# EAGLE board kicker3.0 (EAGLE 4.16)
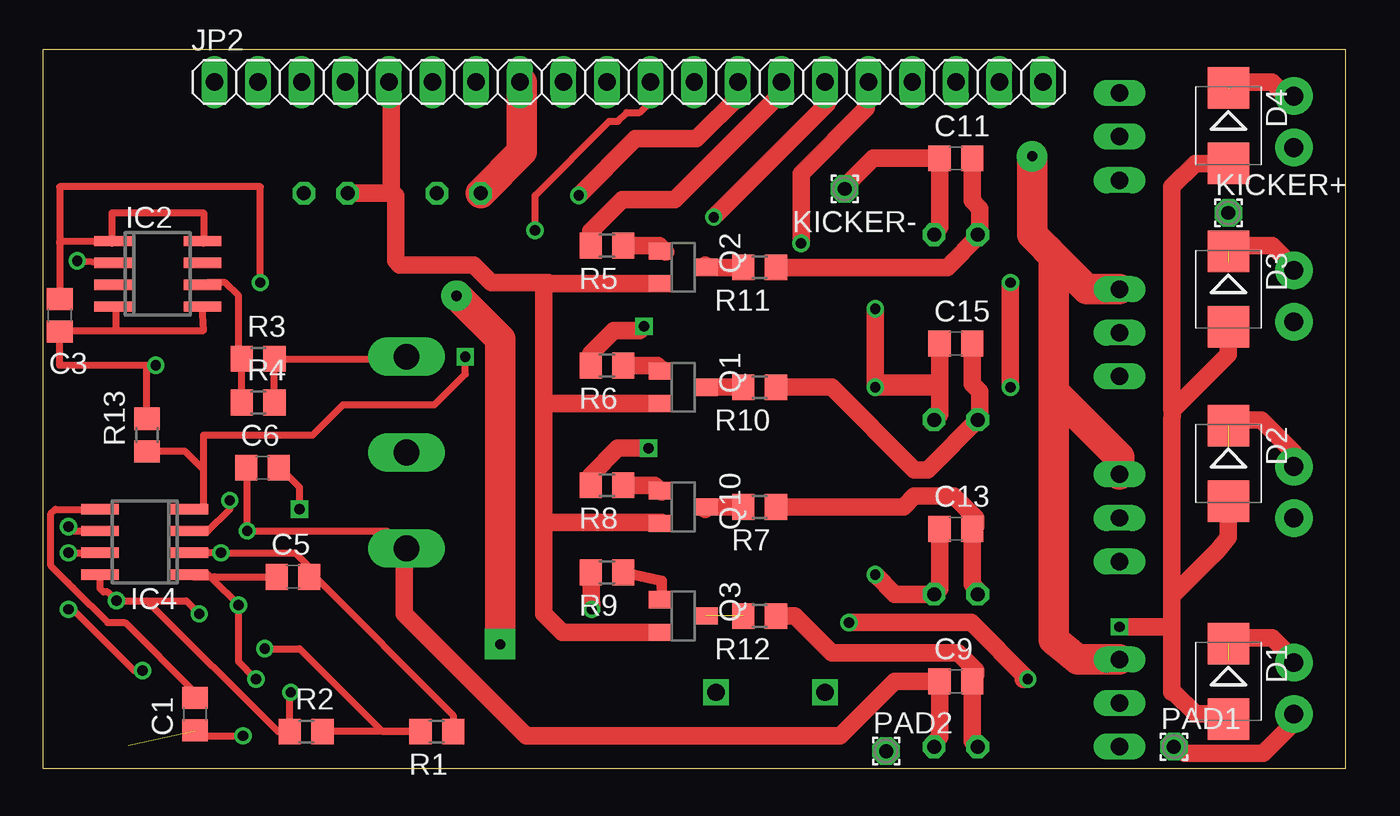
[diagram p0: board, top side]
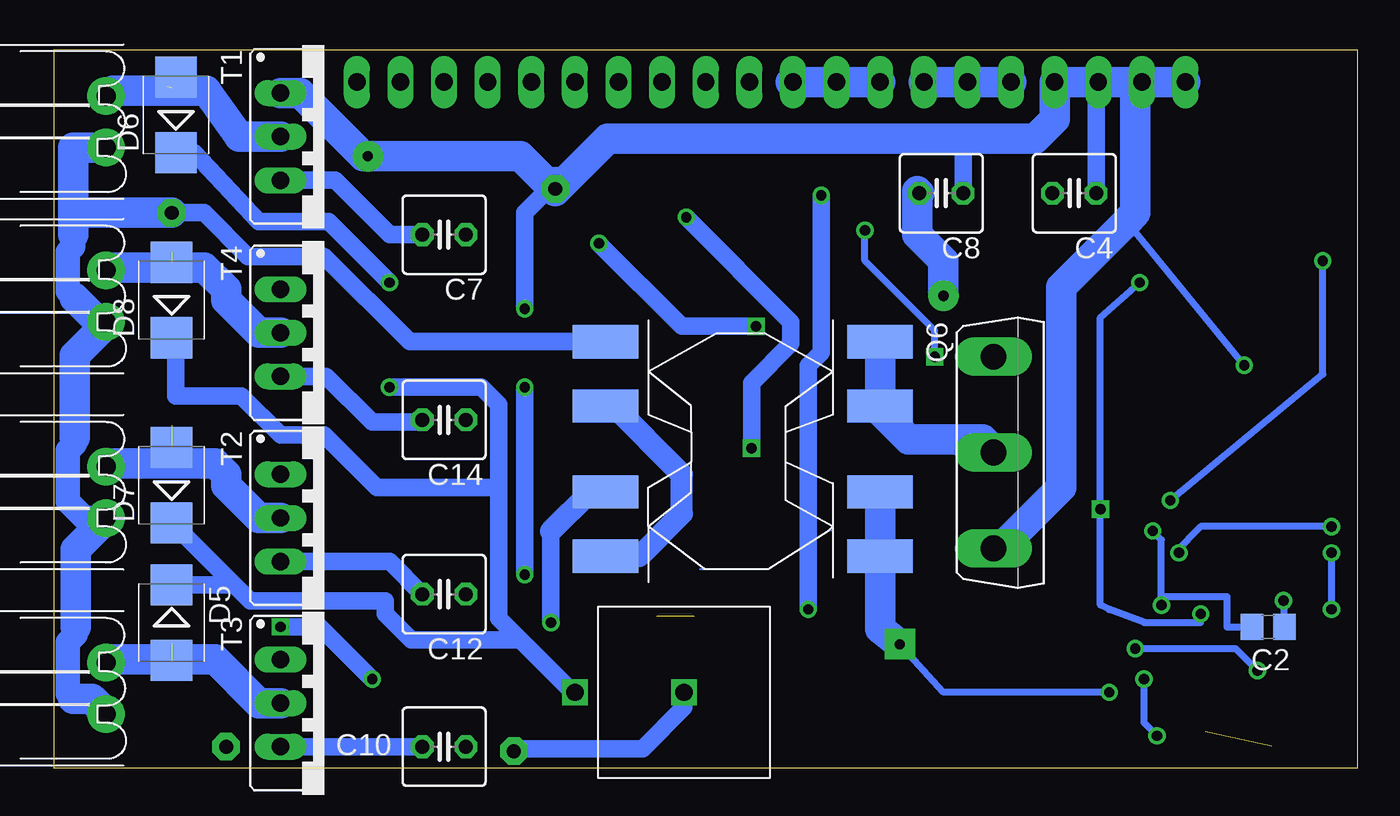
[diagram p1: board, bottom side, seen from below]

Size 75.87 x 41.9 mm. Coordinates in mm from the lower left corner, seen from the top.
Outline: 0,0 75.87,0 75.87,41.9 0,41.9 0,0
Copper layers (1*16): Top 0.035mm / dielectric 1.5mm / Bottom 0.035mm
Design rules "default": minimum track width 10mil, minimum drill 24mil, track to track 8mil, track to pad 8mil, pad to pad 8mil, via to via 8mil, smd to smd 8mil, copper to edge 40mil, drill to drill 8mil, minimum pad ring 10mil, minimum via ring 8mil, stop-mask expansion 4mil, vias tented up to drill 0mil, thermal gap 10mil

## Footprints (pad centres in the part's own frame; a part is rotated, then mirrored left to right if it is on the bottom)
C0805 = smd 1.3 x 1.5: 1 -0.95,0; 2 0.95,0
C025-050X050 = drill 0.813 octagon: 1 -1.27,0; 2 1.27,0
2007 = drill 1.1 pad 2.184 round: P$1 0,0; P$2 3,0
SMB = smd 2.4 x 2.4: A 2.2,0; C -2.2,0
SO-08 = smd 0.6 x 2.2: 1 -1.905,-2.6; 2 -0.635,-2.6; 3 0.635,-2.6; 4 1.905,-2.6; 5 1.905,2.6; 6 0.635,2.6; 7 -0.635,2.6; 8 -1.905,2.6
SO08 = smd 0.6 x 2.2: 1 -1.905,-2.6; 2 -0.635,-2.6; 3 0.635,-2.6; 4 1.905,-2.6; 5 1.905,2.6; 6 0.635,2.6; 7 -0.635,2.6; 8 -1.905,2.6
1X20 = drill 1.016 long: 1 -24.13,0; 2 -21.59,0; 3 -19.05,0; 4 -16.51,0; 5 -13.97,0; 6 -11.43,0; 7 -8.89,0; 8 -6.35,0; 9 -3.81,0; 10 -1.27,0; 11 1.27,0; 12 3.81,0; 13 6.35,0; 14 8.89,0; 15 11.43,0; 16 13.97,0; 17 16.51,0; 18 19.05,0; 19 21.59,0; 20 24.13,0
1,6/0,8 = drill 0.813 pad 1.6 octagon: 1 0,0
SOT23W = smd 1 x 1.4: 1 -0.95,-1.303; 2 0.95,-1.303; 3 0,1.303
TO247BV = drill 1.499 long: D 0,-2.921; G -5.588,-2.921; S 5.588,-2.921
R0805 = smd 1.3 x 1.5: 1 -0.95,0; 2 0.95,0
TO220CS = drill 1.016 long: A 0,-2.54; C -2.54,-2.54; G 2.54,-2.54
SM = smd 3.81 x 1.93: 1 0.5,-3.5; 2 0.5,0.25; 3 0.5,5.25; 4 0.5,9; 5 16.5,9; 6 16.5,5.25; 7 16.5,0.25; 8 16.5,-3.5
XICON = drill 1 square: P$1 0,0; P$2 6.35,0

## Placement (x,y rotation side)
C1  0.1 uF  [C0805]  8.85,3.17 90 top
C2  0.1 uF  [C0805]  5.17,8.25 180 bottom
C3  0.1 uF  [C0805]  0.98,26.41 90 top
C4  100uF  [C025-050X050]  16.47,33.52 180 bottom
C5  1000 pF  [C0805]  14.57,11.17 0 top
C6  0.1 uF  [C0805]  12.79,17.52 0 top
C7  100uF  [C025-050X050]  53.17,31.11 180 bottom
C8  100uF  [C025-050X050]  24.22,33.52 180 bottom
C9  0.1 uF  [C0805]  53.17,5.08 0 top
C10  100uF  [C025-050X050]  53.17,1.27 180 bottom
C11  0.1 uF  [C0805]  53.17,35.55 0 top
C12  100uF  [C025-050X050]  53.17,10.16 180 bottom
C13  0.1 uF  [C0805]  53.17,13.97 0 top
C14  100uF  [C025-050X050]  53.17,20.31 180 bottom
C15  0.1 uF  [C0805]  53.17,24.76 0 top
CAP1  2PINHEADER  [2007]  72.86,3.17 90 bottom
CAP2  2PINHEADER  [2007]  72.86,14.6 90 bottom
CAP3  2PINHEADER  [2007]  72.86,26.03 90 bottom
CAP4  2PINHEADER  [2007]  72.86,36.19 90 bottom
D1  ES2D  [SMB]  69.05,5.08 270 top
D2  ES2D  [SMB]  69.05,17.77 270 top
D3  ES2D  [SMB]  69.05,27.93 270 top
D4  ES2D  [SMB]  69.05,37.46 270 top
D5  ES2D  [SMB]  69.05,8.5 270 bottom
D6  ES2D  [SMB]  68.8,38.1 90 bottom
D7  ES2D  [SMB]  69.05,16.5 90 bottom
D8  ES2D  [SMB]  69.05,27.3 90 bottom
IC2  MIC4420M  [SO-08]  6.69,28.82 270 top
IC4  TLC555CP  [SO08]  5.93,13.2 90 top
JP2  [1X20]  34.12,40 0 top
KICKER+  [1,6/0,8]  69.05,32.38 0 top
KICKER-  [1,6/0,8]  46.7,33.78 0 top
PAD1  [1,6/0,8]  65.88,1.27 0 top
PAD2  [1,6/0,8]  49.11,1.01 0 top
Q1  [SOT23W]  37.3,22.22 270 top
Q2  [SOT23W]  37.3,29.2 270 top
Q3  [SOT23W]  37.3,8.89 270 top
Q6  RFP250  [TO247BV]  18.25,18.41 270 bottom
Q10  [SOT23W]  37.3,15.24 270 top
R1  2.2K  [R0805]  22.95,2.15 180 top
R2  390  [R0805]  15.33,2.15 0 top
R3  10  [R0805]  12.54,23.87 0 top
R4  10  [R0805]  12.54,21.33 0 top
R5  1K  [R0805]  32.85,30.47 180 top
R6  1K  [R0805]  32.85,23.49 180 top
R7  50  [R0805]  41.74,15.24 180 top
R8  1K  [R0805]  32.85,16.5 180 top
R9  1K  [R0805]  32.85,11.43 180 top
R10  50  [R0805]  41.74,22.22 180 top
R11  50  [R0805]  41.74,29.2 180 top
R12  50  [R0805]  41.74,8.89 180 top
R13  1K  [R0805]  6.06,19.43 90 top
T1  S6025L  [TO220CS]  60.16,36.83 270 bottom
T2  S6025L  [TO220CS]  60.16,14.6 270 bottom
T3  S6025L  [TO220CS]  60.16,3.8 270 bottom
T4  S6025L  [TO220CS]  60.16,25.39 270 bottom
U$1  A0009-AL  [SM]  44.28,15.87 0 bottom
U$2  XICON  [XICON]  39.2,4.44 180 bottom

## Library data of the parts
C1-C15 R1-R13 = rcl
CAP1-CAP4 = kickerHeader
D1-D8 = diode
IC2 Q6 = transistor-power
IC4 = linear
JP2 = pinhead
KICKER+ KICKER- PAD1 PAD2 = wirepad
Q1-Q3 Q10 = semicon-smd-ipc
T1-T4 = triac
U$1 = Kicker
U$2 = robocup

## Nets
+5V: C4.2 JP2.5 JP2.6 JP2.7 Q1.2 Q2.2 Q3.2 Q10.2
+12V: C2.1 C3.2 C6.2 C8.2 IC2.1 IC2.8 IC4.8 JP2.8 JP2.9 JP2.10 R2.1 U$1.7 U$1.8
CHARGESHUTOFF: IC4.4 JP2.11 R13.1
N$1: Q6.G R3.2 R4.2
N$2: U$1.1 U$1.3
N$3: Q2.1 R5.1
N$4: IC2.6 R3.1 R4.1
N$5: Q6.D U$1.5 U$1.6
N$6: D1.A D2.A D3.A D4.A U$1.2
N$7: CAP2.P$2 D2.C D7.A T2.A
N$8: C9.2 C10.2 R12.1 T3.G
N$9: Q1.1 R6.1
N$10: CAP3.P$2 D3.C D8.A T4.A
N$12: Q3.1 R9.1
N$13: C12.2 C13.2 R7.1 T2.G
N$14: Q1.3 R10.2
N$15: Q2.3 R11.2
N$16: Q3.3 R12.2
N$17: IC4.7 R1.2 R2.2
N$18: C1.2 IC4.5
N$19: CAP1.P$1 CAP2.P$1 CAP3.P$1 CAP4.P$1 KICKER+.1 PAD1.1 U$1.4
N$20: JP2.15 R8.2
N$21: C5.2 IC4.2 IC4.6 R1.1
N$22: CAP1.P$2 D1.C D5.A T3.A
N$23: C7.2 C11.2 R11.1 T1.G
N$24: IC2.2 IC4.3
N$25: D5.C D6.C D7.C D8.C U$2.P$2
N$26: CAP4.P$2 D4.C D6.A T1.A
N$27: PAD2.1 U$2.P$1
N$28: C14.2 C15.2 R10.1 T4.G
N$30: JP2.13 R9.2
N$31: Q10.3 R7.2
N$32: JP2.14 R5.2
N$33: JP2.16 R6.2
N$34: Q10.1 R8.1
PE: C1.1 C2.2 C3.1 C4.1 C5.1 C6.1 C7.1 C8.1 C9.1 C10.1 C11.1 C12.1 C13.1 C14.1 C15.1 IC2.4 IC2.5 IC4.1 JP2.1 JP2.2 JP2.3 JP2.4 KICKER-.1 Q6.S R13.2 T1.C T2.C T3.C T4.C

## Tracks (layer width: path | path; a pad name or v marks a point on that pad's centre or on a via)
+5V
  Top 1.016: Q3.2 30.25,7.93 29.17,9.01 29.17,14.35 | 29.17,14.35 29.17,21.2 | 29.17,21.2 29.17,28.32 | Q10.2 36,14.31 36.03,14.35 29.17,14.35 | 29.17,21.2 29.43,21.2 29.49,21.27 Q1.2 | 29.17,28.32 29.43,28.32 29.49,28.25 Q2.2 | JP2.7 25.23,39.87 25.11,39.75 25.36,39.49 25.36,39.24 | JP2.5 20.28,40 20.28,33.65 | C4.2 20.15,33.52 20.28,33.65 | 29.17,28.32 26.12,28.32 25.11,29.33 20.79,29.33 20.54,29.59 20.54,33.4 20.28,33.65
  Bottom 1.778: JP2.5 JP2.6 JP2.7
+12V  (via drill 0.6 pad 0.41, 0.6 pad 1.78)
  Top 0.406: IC4.8 3.33,10.47 3.52,10.28 3.77,10.28 v4.28,9.77 6.06,9.77 | 6.06,9.77 13.68,2.15 R2.1 14.38,4.38 v14.44,4.44 | 6.06,9.77 8.34,9.77 v9.11,9.01 | 13.74,17.59 13.68,17.65 | 13.74,17.59 C6.2 13.81,17.52 14.95,16.38 | 14.95,16.38 13.74,17.59 | v14.95,15.11 14.95,16.38 | v12.66,28.32 12.66,33.9 0.98,33.9 0.98,30.6 | 9.36,30.86 9.04,30.79 IC2.8 9.36,30.73 | 4.03,30.73 4.03,30.6 | 4.03,30.73 IC2.1 0.98,30.73 0.98,30.6 | 4.03,30.73 4.03,32.38 9.36,32.38 9.36,30.73 | 0.98,27.3 C3.2 0.98,30.6 | 9.36,30.73 9.36,30.6
  Top 1.016: C8.2 25.49,33.78 | 27.9,40 JP2.8
  Top 1.778: v26.63,7.23 26.63,25.01 v24.09,27.55 | 27.9,40 27.9,35.94 C8.2
  Bottom 0.406: v14.44,4.44 24.09,4.44 v26.63,7.23 | v12.66,28.32 14.95,26.28 v14.95,15.11 14.95,9.52 14.44,9.27 12.41,8.5 9.11,8.5 v9.11,9.01 | C2.1 v4.28,9.77
  Bottom 1.778: JP2.9 30.44,40 | JP2.8 JP2.9 | 32.98,40 JP2.10 JP2.9 | U$1.8 27.79,12.45 27.9,12.57 27.79,12.69 U$1.7 27.79,8.13 v26.63,7.23 | v24.09,27.55 24.09,29.59 25.62,31.11 25.62,33.65 C8.2
CHARGESHUTOFF  (via drill 0.6 pad 0.41)
  Top 0.406: 8.09,15.11 IC4.4 9.36,15.11 9.36,17.39 | v24.6,24 24.6,22.98 22.82,21.2 17.49,21.2 15.71,19.43 9.36,19.43 9.36,17.39 | v28.66,31.36 28.66,33.4 32.98,37.71 33.49,37.71 34,38.22 34.76,38.22 35.52,38.98 35.52,39.75 35.27,40 JP2.11 | R13.1 8.28,18.48 9.36,17.39
  Bottom 0.406: v24.6,24 24.6,25.52 28.66,29.59 v28.66,31.36
N$1
  Top 0.406: R4.2 13.49,21.4 13.42,21.46 13.49,21.52 R3.2 21.17,23.87 21.3,24 Q6.G
N$2
  Bottom 1.016: U$1.3 43.78,20.81
  Bottom 1.27: U$1.1 41.82,12.37 39.33,14.85 39.33,17.14 43.4,21.2 43.48,21.12 U$1.3
N$3
  Top 1.016: 36.22,30.15 36.28,30.09 | 36.22,30.15 Q2.1 | R5.1 35.9,30.47 36.22,30.15
N$4
  Top 0.406: 11.52,23.87 11.39,24 11.39,27.55 10.63,28.32 9.61,28.32 9.36,28.06 9.29,28.13 IC2.6 | 11.52,23.87 R3.1 | R4.1 11.59,23.8 11.52,23.87
N$5
  Bottom 1.778: U$1.6 27.79,21.32 27.65,21.46 27.79,21.59 U$1.5 27.79,20.83 26.12,19.17 21.81,19.17 21.04,18.41 Q6.D
N$6  (via drill 0.6, 0.6 pad 0.41)
  Top 1.016: D3.A 69.05,24.12 65.81,20.89 | 65.81,20.89 65.75,20.31 65.75,10.03 | D2.A 69.05,13.46 68.41,12.7 65.75,10.03 | D1.A 69.05,3.17 67.14,3.17 65.88,4.44 65.75,4.44 65.75,8.5 | D4.A 67.1,35.26 65.75,33.9 65.75,20.95 65.81,20.89 | 57.11,5.2 v57.37,5.2 54.06,8.5 v46.95,8.5 | v62.7,8.25 65.75,8.25 65.75,8.5 | 65.75,8.5 65.75,10.03
  Bottom 1.016: v62.7,8.25 60.41,8.25 v57.37,5.2 | v46.95,8.5 46.95,13.84
  Bottom 1.27: U$1.2 44.67,16.12 46.95,13.84
N$7  (1 unrouted)
  Top 1.016: CAP2.P$2 72.86,18.41 70.95,20.31 69.05,20.31 D2.C
  Bottom 1.778: T2.A 63.97,14.6 65.88,16.5 65.88,17.14 66.51,17.77 72.86,17.77 CAP2.P$2
N$8
  Top 1.016: C10.2 54.12,1.58 C9.2 54.12,5.14 54.06,5.2 54.32,5.46 54.32,5.71 53.3,6.73 45.94,6.73 43.78,8.89 R12.1
  Bottom 1.016: C10.2 54.57,1.14 54.7,1.27 T3.G
N$9
  Top 1.016: Q1.1 36,23.2 36.03,23.24 35.78,23.49 R6.1
N$10  (1 unrouted)
  Top 1.016: CAP3.P$2 72.86,29.2 71.59,30.47 69.05,30.47 D3.C
  Bottom 1.778: T4.A 63.97,25.39 65.88,27.3 65.88,27.93 67.14,29.2 72.86,29.2 CAP3.P$2
N$12
  Top 0.61: 36.03,9.77 36.03,9.84 | 36.03,9.84 Q3.1 | R9.1 36.03,10.92 36.03,9.84
N$13
  Top 1.016: C12.2 54.57,10.28 54.12,10.73 C13.2 54.19,13.97 54.32,14.09 54.32,14.6 53.05,15.87 50.76,15.87 50.13,15.24 R7.1
  Bottom 1.016: 54.32,10.03 C12.2 56.35,12.06 T2.G
N$14
  Top 1.016: 38.57,22.22 Q1.3 R10.2
N$15
  Top 1.016: 38.6,29.3 38.57,29.33 | 38.6,29.3 Q2.3 | R11.2 38.7,29.2 38.6,29.3
N$16  (1 unrouted)
N$17  (via drill 0.6 pad 0.41)
  Top 0.406: R1.2 22.06,2.15 | R1.2 R2.2 | R1.2 19.77,2.15 14.95,6.98 v12.92,6.98 | v5.8,5.71 5.3,5.71 1.74,9.27 v1.49,9.27 | v1.49,12.57 IC4.7
  Bottom 0.406: v12.92,6.98 7.07,6.98 v5.8,5.71 | v1.49,9.27 v1.49,12.57
N$18
  Top 0.406: 1.74,10.54 3.77,8.5 4.79,8.5 8.85,4.44 C1.2 | 1.74,10.54 1.49,10.79 | IC4.5 0.72,15.11 0.47,14.85 0.47,11.81 1.74,10.54
N$19
  Top 1.016: CAP1.P$1 72.86,2.66 71.08,0.88 66.51,0.88 66,1.39 PAD1.1
  Bottom 1.016: U$1.4 55.19,24.87 60.16,29.84 64.61,29.84 67.14,32.38 KICKER+.1
  Bottom 1.422: 74.77,31.11 74.77,30.41 75.08,30.09 75.08,27.81 74.7,27.43 | 74.7,19.3 74.7,18.92 75.08,18.54 75.08,15.55 74.13,14.6 CAP2.P$1 | 74.64,8.25 74.64,7.81 75.08,7.36 75.08,4.38 74.77,4.06
  Bottom 1.778: CAP4.P$1 74.77,36.19 74.77,32.38 | 74.77,31.11 74.77,32.38 | 73.11,25.84 72.92,26.03 CAP3.P$1 | 73.11,25.84 74.7,27.43 | 73.11,25.84 73.11,25.65 74.7,24.06 74.7,19.3 | CAP2.P$1 72.86,14.54 74.64,12.76 74.64,8.25 | CAP1.P$1 72.8,3.17 73.69,4.06 74.77,4.06 | 74.77,32.38 KICKER+.1
N$20  (via drill 0.6)
  Top 1.016: R8.2 31.9,17.08 33.49,18.66 v35.27,18.66 | v39.08,32.13 45.68,38.73 45.68,40 JP2.15
  Bottom 1.016: v35.27,18.66 35.27,22.47 32.98,24.76 32.98,26.03 v39.08,32.13
N$21  (via drill 0.6 pad 0.41)
  Top 0.406: R1.1 23.9,3.11 15.71,11.3 15.58,11.17 C5.2 15.52,11.75 14.69,12.57 v10.38,12.57 IC4.2 | IC4.6 1.74,13.84 v1.49,14.09
  Bottom 0.406: v10.38,12.57 10.63,12.57 9.11,14.09 v1.49,14.09
N$22  (1 unrouted)
  Top 1.016: CAP1.P$2 72.86,6.34 71.59,7.62 69.05,7.62 D1.C
  Bottom 1.778: T3.A 63.97,3.8 66.51,6.34 72.86,6.34 CAP1.P$2
N$23
  Top 1.016: C11.2 54.12,33.08 54.57,32.63 54.57,31.36 54.45,31.24 C7.2 | C7.2 54.32,31.11 | C7.2 54.57,31.11 52.67,29.2 R11.1
  Bottom 1.016: T1.G 59.52,34.29 56.35,31.11 C7.2
N$24  (via drill 0.6)
  Top 0.406: v10.88,15.62 10.88,15.11 9.61,13.84 IC4.3 | v1.99,29.59 IC2.2
  Bottom 0.406: v1.99,29.59 1.99,22.98 v10.88,15.62
N$25  (via drill 0.6)
  Top 1.016: v56.35,22.22 v56.35,28.32
  Bottom 1.016: D6.C 67.74,35.9 63.97,31.87 59.91,31.87 v56.35,28.32 | U$2.P$2 45.68,4.44 48.73,7.49 | 48.73,7.49 55.08,7.49 56.6,9.01 56.6,9.77 64.48,9.77 65.49,10.79 | D7.C 69.01,14.31 65.49,10.79 | D5.C 65.58,10.7 65.49,10.79 | v56.35,22.22 51.02,22.22 50,21.2 50,16.38 | 50,16.38 50,8.76 48.73,7.49 | D8.C 68.8,25.1 68.8,21.71 64.99,21.71 62.7,19.43 60.16,19.43 57.11,16.38 50,16.38
N$26  (1 unrouted)
  Top 1.016: CAP4.P$2 72.4,39.19 71.59,40 69.05,40 D4.C
  Bottom 1.016: D6.A 68.8,40.51 68.54,40.76 68.54,40.51 69.3,39.75
  Bottom 1.778: T1.A 65.11,36.83 67.02,39.49 72.48,39.49 72.86,39.37 CAP4.P$2
N$27
  Bottom 1.016: U$2.P$1 39.2,3.55 41.62,1.14 49.24,1.14 PAD2.1
N$28
  Top 1.016: C15.2 54.12,22.41 54.57,21.97 54.57,20.44 | R10.1 45.94,22.22 50.76,17.39 51.52,17.39 54.57,20.44 | 54.57,20.44 C14.2
  Bottom 1.016: T4.G 60.03,22.86 57.37,20.19 54.32,20.19 C14.2
N$30  (via drill 0.6)
  Top 1.016: R9.2 31.9,11.11 v31.97,9.27 | v31.2,33.4 34.51,36.7 38.06,36.7 40.6,39.24 40.6,40 JP2.13
  Bottom 1.016: v31.97,9.27 31.97,23.49 31.2,24.25 v31.2,33.4
N$31
  Top 1.016: 38.6,15.14 38.57,15.11 | Q10.3 38.6,15.14 | R7.2 38.7,15.24 38.6,15.14
N$32
  Top 1.016: R5.2 31.9,31.3 33.74,33.14 36.79,33.14 43.14,39.49 43.14,39.75 43.02,39.87 JP2.14
N$33  (via drill 0.6)
  Top 1.016: R6.2 31.9,24.19 33.24,25.52 34.76,25.52 v35.01,25.78 | v44.16,30.6 44.16,34.67 47.97,38.48 47.97,40 JP2.16
  Bottom 1.016: v35.01,25.78 39.33,25.78 v44.16,30.6
N$34
  Top 1.016: 36,16.16 36.03,16.12 | Q10.1 36,16.16 | R8.1 35.65,16.5 36,16.16
PE  (via drill 0.6, 0.6 pad 0.41, 0.6 pad 1.78)  (2 unrouted)
  Top 0.406: JP2.1 10.12,40 | 9.87,11.04 9.61,11.3 IC4.1 8.6,11.3 8.73,11.17 C5.1 10,11.17 9.87,11.04 | v12.41,5.2 11.39,6.22 v11.39,9.52 9.87,11.04 | C1.1 8.85,2.15 9.11,1.9 v11.65,1.9 | Q6.S 21.04,12.82 20.03,13.84 v11.9,13.84 11.9,17.14 11.65,17.39 11.77,17.52 C6.1 | 6.06,23.49 v6.57,23.49 | 6.06,23.49 0.98,23.49 C3.1 0.98,25.52 4.28,25.52 | IC2.4 4.28,26.79 4.28,25.52 | IC2.5 9.36,25.52 4.28,25.52 | R13.2 6.06,23.49
  Top 1.016: C7.1 51.91,31.24 52.23,31.56 C11.1 48.35,35.55 46.7,33.9 KICKER-.1 | 51.78,20.19 C14.1 52.23,20.63 | 52.23,20.63 52.23,22.22 | 52.23,22.22 C15.1 | C13.1 52.23,10.48 C12.1 49.62,10.16 v48.48,11.3 | C10.1 51.78,1.39 52.23,1.84 C9.1 49.62,5.08 46.44,1.9 28.16,1.9 21.04,9.01 21.04,12.57 21.3,12.82 Q6.S | 52.23,22.22 v48.48,22.22 | 52.23,20.63 52.23,22.28 52.03,22.47 48.48,22.47 v48.48,26.79
  Top 1.778: T4.C 60.8,27.93 58.38,30.35 | 58.38,30.35 57.62,31.11 v57.62,35.68 | T2.C 62.7,18.16 58.89,21.97 58.89,22.47 | 58.89,22.47 58.89,29.84 58.38,30.35 | T3.C 60.29,6.34 58.89,7.49 58.89,22.47
  Bottom 0.406: v12.41,5.2 12.41,2.66 v11.65,1.9 | v11.39,9.52 11.39,10.03 | 11.39,10.03 11.39,13.33 v11.9,13.84 | v6.57,23.49 13.42,31.87 | C2.2 7.58,8.25 7.58,10.03 11.39,10.03
  Bottom 1.016: v48.48,22.22 v48.48,11.3 | v48.48,26.79 48.48,32.38 46.95,33.9 | C8.1 22.95,36.57 22.82,36.7 | 15.2,40 C4.1
  Bottom 1.778: T1.C 61.56,39.37 57.87,35.68 v57.62,35.68 48.73,35.68 46.95,33.9 | 46.7,33.65 46.95,33.9 | 46.95,33.9 46.82,33.78 KICKER-.1 46.7,33.65 | 46.95,33.9 46.7,34.16 | JP2.1 JP2.2 12.66,40 | 12.66,40 JP2.3 15.2,40 JP2.4 17.61,37.84 18.76,36.7 22.82,36.7 43.65,36.7 46.7,33.65 | Q6.S 20.79,12.82 17.23,16.38 17.23,28.06 13.42,31.87 12.92,32.38 12.92,39.75 12.66,40